# Altium PCB PCB1.PcbDoc
Units mil, origin at the board's own origin, x right, y up, seen from the top; angles counter-clockwise.
Board outline 2525 x 1870 mil, 2 copper layers (Top Layer, Bottom Layer); 35 components, 16 nets, 87 pads, 34 vias.
Unrouted connection lines stored in the file: 1.
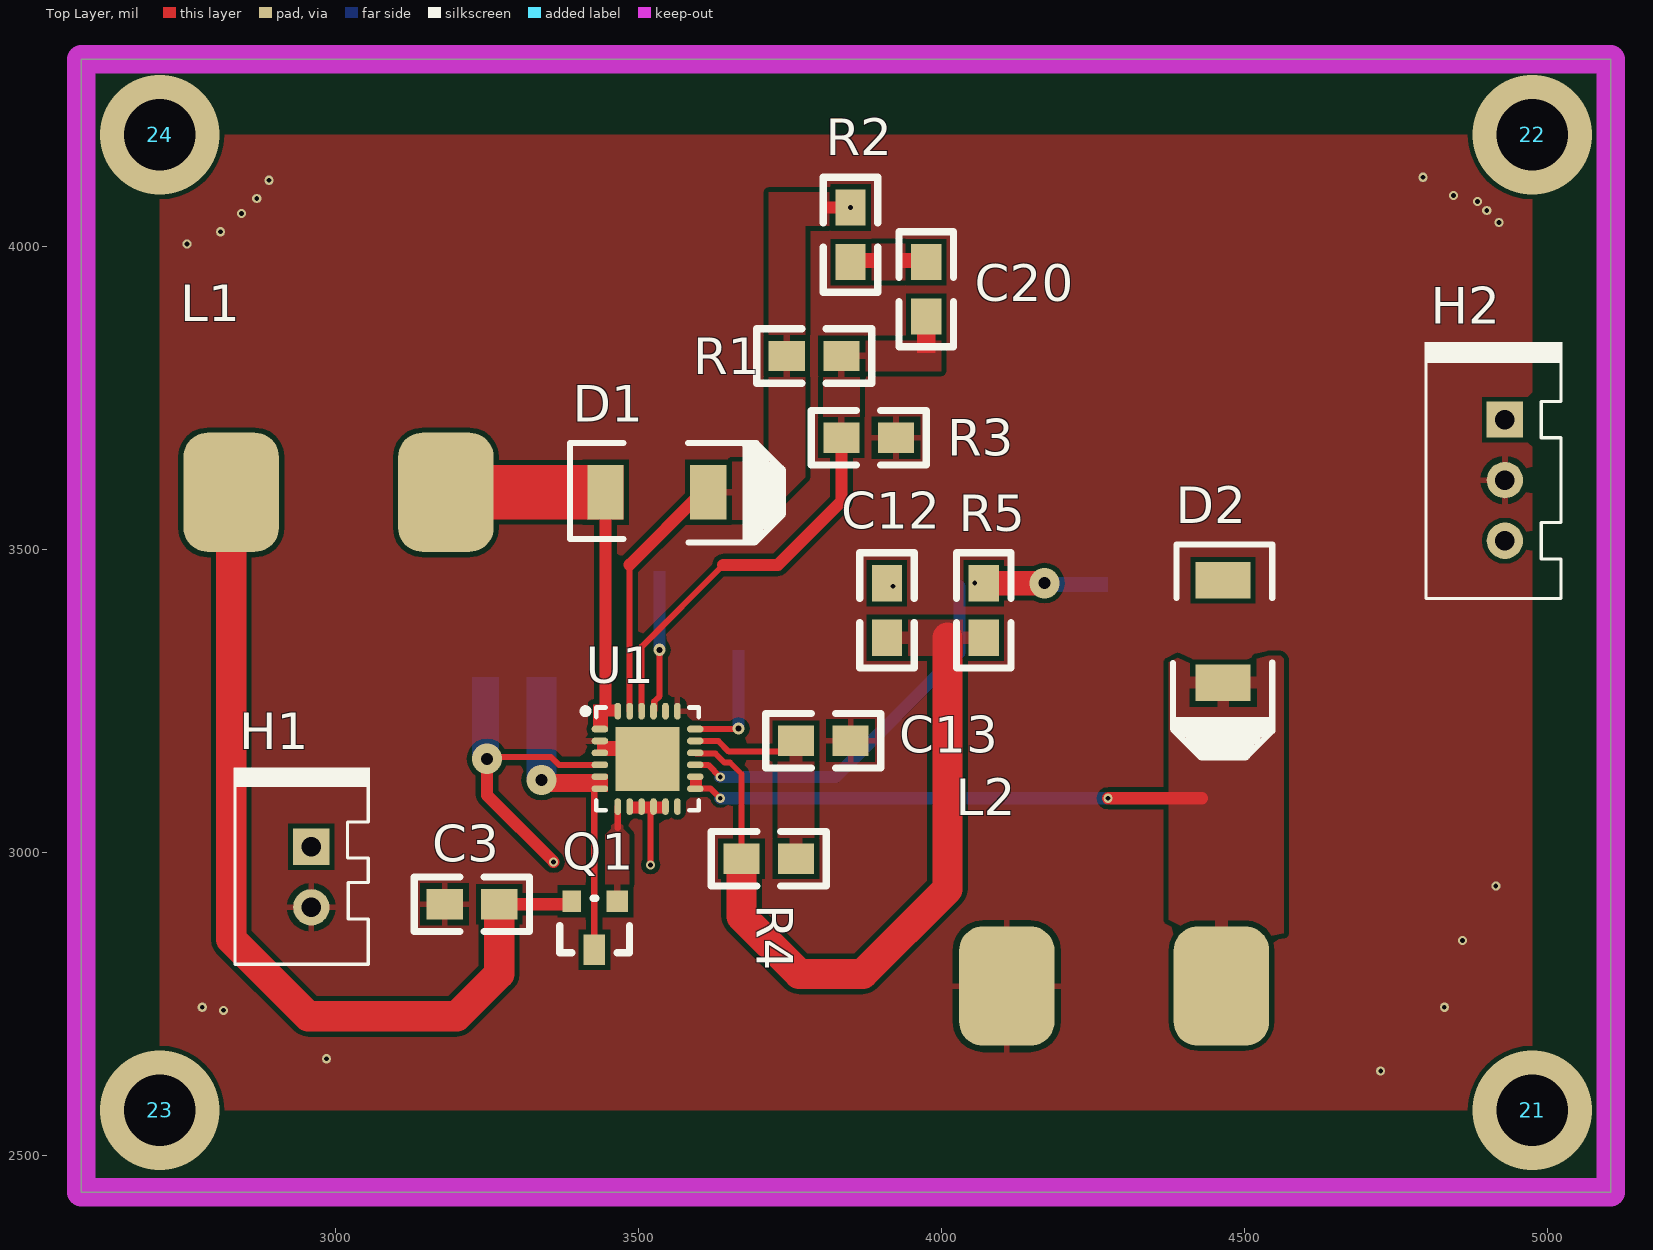
[diagram p0: Top Layer view]
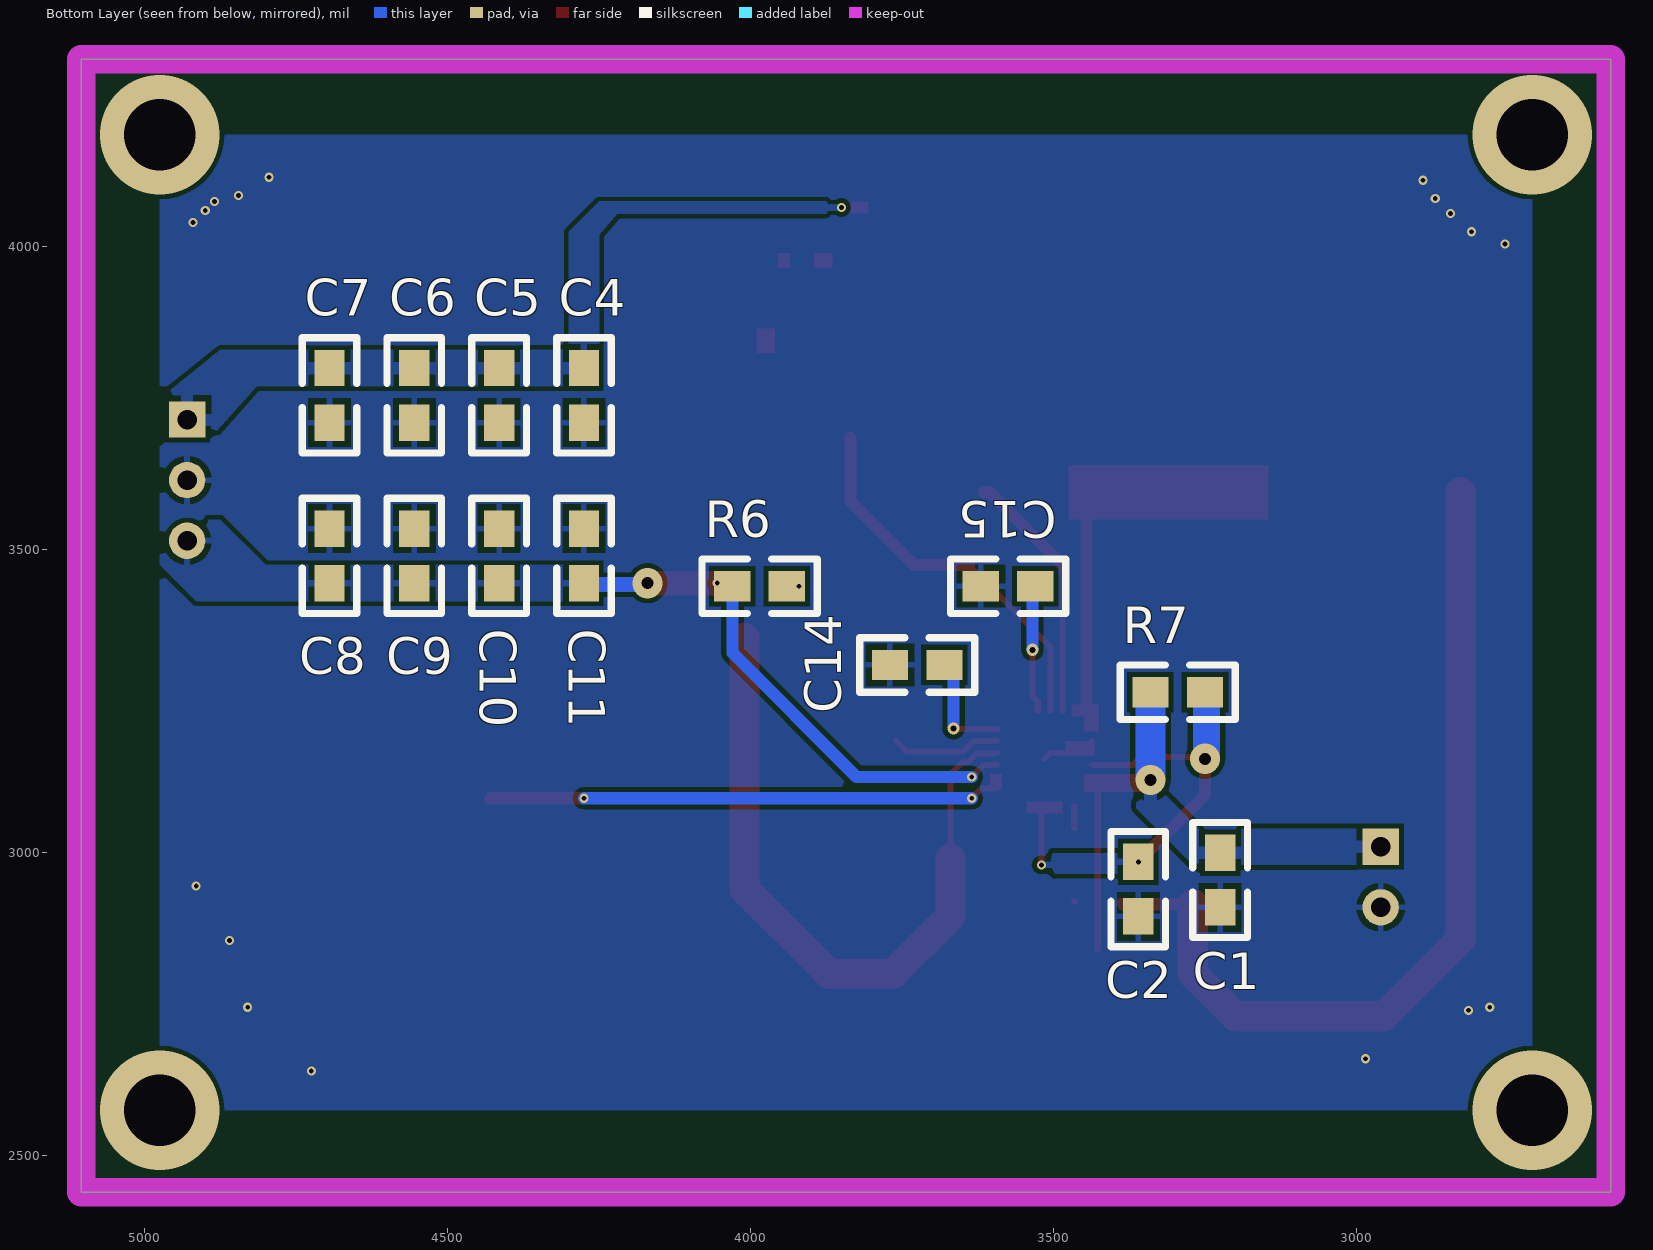
[diagram p1: Bottom Layer view, seen from below]

## Layer stack, top to bottom
Top Solder: solder mask 0.4, Solder Resist, Dk 3.5
Top Layer: signal copper 1.4
Dielectric 1: dielectric 12.6, FR-4, Dk 4.8
Bottom Layer: signal copper 1.4
Bottom Solder: solder mask 0.4, Solder Resist, Dk 3.5

## Board outline
2580,2440 5105,2440 5105,4310 2580,4310

## Design rules (kind name [scope] priority, off if disabled: settings)
Clearance [All] p1: gap=8
HoleSize [All] p1: absolutevalues=TRUE maxlimit=100 minlimit=12 maxpercent=80.000 minpercent=20.000
PolygonConnect [All] p1: connectstyle=Relief reliefconductorwidth=10 reliefentries=4 polygonreliefangle="90 Angle" airgapwidth=10
RoutingVias [All] p1: holewidth=28 width=50 viastyle="Through Hole" minholewidth=28 minwidth=50 maxholewidth=28 maxwidth=50
SolderMaskExpansion [All] p1: expansion=4
Width [All] p1: maxlimit=100 minlimit=6 preferedwidth=8
29 further rules are at their usual default settings.

## Components (designator, comment, footprint, x,y, rotation, side; value= is the part's Value field where it differs from the comment)
21 "螺丝孔" 固定过孔 4975,2575 r0 top
22 "螺丝孔" 固定过孔 4975,4185 r0 top
23 "螺丝孔" 固定过孔 2710,2575 r0 top
24 "螺丝孔" 固定过孔 2710,4185 r0 top
C1 "Cap1" 0805 3225,2910 r90 bottom
C2 "Cap1" 0805 3360,2895 r90 bottom
C3 "Cap1" 0805 3180,2915 r0 top
C4 "Cap1" 0805 4275,3710 r90 bottom
C5 "Cap1" 0805 4415,3710 r90 bottom
C6 "Cap1" 0805 4555,3710 r90 bottom
C7 "Cap1" 0805 4695,3710 r90 bottom
C8 "Cap1" 0805 4695,3535 r270 bottom
C9 "Cap1" 0805 4555,3535 r270 bottom
C10 "Cap1" 0805 4415,3535 r270 bottom
C11 "Cap1" 0805 4275,3535 r270 bottom
C12 "Cap1" 0805 3910,3445 r270 top
C13 "Cap1" 0805 3760,3185 r0 top
C14 "Cap1" 0805 3680,3310 r0 bottom
C15 "Cap1" 0805 3530,3440 r0 bottom
C20 "Cap1" 0805 3975,3885 r90 top
D1 "MBRM120" SMB 3445.71,3595 r0 top
D2 "MBRM120" SMB 4465,3450 r270 top
H1 "TJC3-2A" TJC3-2A 2960,3010 r270 top
H2 "TJC3-3A" TJC3-3A 4930,3614.83 r90 top
L1 "SMD" "功率电感-12x12 - duplicate" 3005,3595 r0 top
L2 "SMD" "功率电感-12x12 - duplicate" 4285,2780 r0 top
Q1 "AO3401" SOT-23 3512.76,2799.72 r180 top
R1 "RES" 0805 3835,3820 r180 top
R2 "RES" 0805 3850,3975 r90 top
R3 "RES" 0805 3835,3685 r0 top
R4 "RES" 0805 3670,2990 r0 top
R5 "RES" 0805 4070,3445 r270 top
R6 "RES" 0805 4030,3440 r180 bottom
R7 "RES" 0805 3340,3265 r180 bottom
U1 "TPS65131" LC-QFN-24_4x4x05P 3515,3155 r270 top

## Footprints (in the part's own frame and the unit in brackets; to place one, negate y for a bottom-side part, rotate by r counter-clockwise, add the part's x,y. Pads: shape width x height; smd on the part's side, far side on the other; paste and mask are expansions set on the pad)
0805 [mil]
  rect 60x50 smd: 1(0,0) 2(90,0)
  silkscreen extent -50,-45 140,45
LC-QFN-24_4x4x05P [mm]
  rect 2.68x2.68 smd mask+0.051: 0(0,0)
  oval 0.28x0.7 smd mask+0.051: 1(-1.25,-2) 2(-0.75,-2) 3(-0.25,-2) 4(0.25,-2) 5(0.75,-2) 6(1.25,-2) 13(1.25,2) 14(0.75,2) 15(0.25,2) 16(-0.25,2) 17(-0.75,2) 18(-1.25,2)
  oval 0.7x0.28 smd mask+0.051: 7(2,-1.25) 8(2,-0.75) 9(2,-0.25) 10(2,0.25) 11(2,0.75) 12(2,1.25) 19(-2,1.25) 20(-2,0.75) 21(-2,0.25) 22(-2,-0.25) 23(-2,-0.75) 24(-2,-1.25)
  silkscreen extent -2.15,-2.72 2.15,2.15
SMB [mm]
  rect 1.52x2.3 smd: A(0,0) K(4.3,0)
  silkscreen extent -1.5,-2.11 7.44,2.06
SOT-23 [mil]
  rect 36x36 smd: 1(47.76,-120.28)
  rect 30x36 smd: 2(122.76,-120.28)
  rect 36x50 smd: 3(85.76,-40.28)
  silkscreen extent 28,-125 143,-35
TJC3-2A [mil]
  rect 60x60 hole 32: 1(0,0)
  round 60 hole 32: 2(100,0)
  silkscreen extent -131,-128 194,97
TJC3-3A [mil]
  rect 60x60 hole 32: 1(100.17,0)
  round 60 hole 32: 2(0.17,0) 3(-99.83,0)
  silkscreen extent -196,-95 228,132
"功率电感-12x12 - duplicate" [mm]
  rrect50% 4x5 smd: 1(-4.5,0) 2(4.5,0)
  body extent -6.08,-6.15 6.21,6.15, height 8
固定过孔 [mil]

## Part data
L1 L2: library part 功率电感

## Via types
v1: diameter 15, hole 8, Top Layer to Bottom Layer, 25 vias
v2: diameter 196.85, hole 118.11, Top Layer to Bottom Layer, 4 vias
v3: diameter 50, hole 20, Top Layer to Bottom Layer, 3 vias
v4: diameter 20, hole 10, Top Layer to Bottom Layer, 2 vias

## Nets (pads, with @x,y where several pads share a name; then routed paths per layer and width w, separated by ;. In a path a pad name is that pad's centre, name@x,y a point inside that pad or via, vN(x,y) a via of type N, cw(c..) or ccw(c..) an arc to the next point about the centre after c; other vN are vias at no path point)
AGND: C1.1 C2.1 C3.1 C4.1 C5.1 C6.1 C7.1 C8.1 C9.1 C10.1 C11.1 C13.2 C14.2 C15.2 H1.2 H2.2 L2.1 R3.2 U1.0 U1.2 U1.3 U1.19 | length 102.5
  Top Layer w10: U1.2 U1.3 3505.16,3164.84 U1.0
  other v1: 4725,2640 2985,2660 2815,2740 2780,2745 4830,2745 4860,2855 4915,2945 2755,4005 2810,4025 4920,4040 2845,4055 4900,4060 4885,4075 2870,4080 4845,4085 2890,4110 4795,4115
NetC1_2: C1.2 H1.1 Q1.3 R7.1 U1.5 U1.6 | length 267
  Top Layer w10: Q1.3 U1.6@3427,3107
  other v3: 3340,3120
NetC2_2: C2.2 R7.2 U1.4 U1.8 U1.9 U1.10 U1.11 | length 408.4
  Top Layer w10: v3(3250,3155) 3253,3158 3355.74,3158 3368.58,3145.16 U1.4
  Top Layer w20: v3(3250,3155) 3250,3095 v1(3360,2985)
  other v1: 3520,2980
NetC3_2: C3.2 L1.1 Q1.2 | length 1498.7
  Top Layer w10: Q1.2@3385,2915 Q1.2
  Top Layer w20: C3.2 Q1.2@3385,2915
  Top Layer w50: L1.1 2827.83,2857.17 2955,2730 3200,2730 3270,2800 C3.2
NetC4_2: C4.2 C5.2 C6.2 C7.2 D1.K H2.1 R1.2 R2.2 U1.23 | length 420.8
  Top Layer w10: U1.23 3485.47,3475.47
  Top Layer w20: 3485.47,3475.47 3605,3595 D1.K
  other v1: 3850,4065
NetC8_2: C8.2 C9.2 C10.2 C11.2 D2.A H2.3 R5.1 R6.1 U1.15 | length 639.5
  Top Layer w10: U1.15 3614.84,3145.16 v1(3635,3125)
  Bottom Layer w20: v1(3635,3125) 3825,3125 4030,3330 R6.1
  other v1: 4055,3445
  other v3: 4170,3445
NetC12_1: C12.1 R6.2
  other v1: 3920,3440
NetC12_2: C12.2 R4.1 R5.2 U1.16 | length 1178
  Top Layer w10: U1.16 3594.91,3163.67 3627.13,3163.67 3641.8,3149 3651,3149 3670,3130 R4.1
  Top Layer w50: R4.1 3670,2895 3765,2800 3870,2800 4010,2940 4010,3355
NetC13_1: C13.1 R4.2 U1.17 | length 181
  Top Layer w10: U1.17 3631.73,3184.53 3649.26,3167 3742,3167 C13.1
NetC14_1: C14.1 U1.18 | length 71.6
  Top Layer w10: U1.18 3664.21,3204.21 v4(3665,3205)
NetC15_1: C15.1 U1.21 | length 105.5
  Top Layer w10: U1.21 3526.02,3234.91 3526.02,3249.68 3535,3258.66 v4(3535,3335)
NetC20_1: C20.1 R1.1 R3.1 U1.22 | length 640.6
  Top Layer w10: U1.22 3505.16,3340.16 3640,3475
  Top Layer w20: 3640,3475 3730,3475 3835,3580 R3.1
NetC20_2: C20.2 R2.1
NetD1_1: D1.A L1.2 U1.1 U1.24 | length 357.1
  Top Layer w20: 3445.71,3237.89 D1.A
NetD2_2: D2.K L2.2 U1.13 U1.14 | length 842.8
  Top Layer w10: U1.13 3619.21,3105.79 v1(3635,3090)
  Top Layer w20: v1(4275,3090) 4430,3090
  Bottom Layer w20: v1(3635,3090) v1(4275,3090)
NetQ1_1: Q1.1 U1.7 | length 36.6
  Top Layer w10: Q1.1 Q1.1@3465.79,2920.79 ; 3465.79,3040.79 U1.7
pads on no net: U1.12 U1.20
copper on no net:
  other v2: 2710,2575 4975,2575 2710,4185 4975,4185

## Polygon pours and split planes (outlines as drawn)
AGND on Top Layer "Top Layer-No Net" (solid, pour order 60): 2710,2575 4975,2575 4975,4185 2710,4185
NetC20_1 on Top Layer "Top Layer-No Net" (solid, pour order 50): 3805,3845 3805,3660 3865,3660 3865,3845
NetC20_1 on Top Layer "Top Layer-No Net" (solid, pour order 48): 3805,3795 4000,3795 4000,3915 3950,3915 3950,3845 3805,3845
NetC20_2 on Top Layer "Top Layer-No Net" (solid, pour order 46): 3825,4005 3825,3945 4000,3945 4000,4005
NetC4_2 on Top Layer "Top Layer-No Net" (solid, pour order 44): 3715,3795 3715,4090 3875,4090 3875,4035 3775,4035 3775,3795
NetC4_2 on Top Layer "Top Layer-No Net" (solid, pour order 42): 3585,3550 3645,3550 3705,3550 3775,3620 3775,3625 3775,3845 3715,3845 3715,3650 3710,3645 3590,3645 3585,3645
NetD2_2 on Top Layer "Top Layer-No Net" (solid, pour order 0): 4400,2685 4565,2685 4565,3320 4560,3325 4375,3325 4375,2685
NetC13_1 on Top Layer "Top Layer-No Net" (solid, pour order 8): 3730,2965 3790,2965 3790,3210 3730,3210
NetC12_2 on Top Layer "Top Layer-No Net" (solid, pour order 28): 3885,3385 3885,3325 4095,3325 4095,3385
NetQ1_1 on Top Layer "Top Layer-No Net" (solid, pour order 32): 3445,2900 3485,2900 3485,3030 3475,3040 3475,3055 3475,3095 3455,3095 3455,3040 3445,3030 3445,2900
AGND on Bottom Layer "Top Layer-No Net" (solid, pour order 62): 2710,2575 4975,2575 4975,4185 2710,4185
NetC4_2 on Bottom Layer "Top Layer-No Net" (solid, pour order 52): 3840,4055 4170,4055 4175,4055 4220,4055 4250,4020 4250,3980 4250,3770 4300,3770 4300,4025 4250,4075 3850,4075
NetC1_2 on Bottom Layer "Top Layer-No Net" (solid, pour order 20): 3255,2955 3255,3015 3230,3040 2930,3040 2930,2980 2995,2980 3205,2980 3205,2955
NetC1_2 on Bottom Layer "Top Layer-No Net" (solid, pour order 22): 3200,3030 3250,3030 3315,3095 3315,3120 3365,3120 3365,3090 3365,3075 3260,2970 3200,2970
NetC4_2 on Bottom Layer "Top Layer-No Net" (solid, pour order 24): 4250,3770 4720,3770 4795,3770 4815,3770 4900,3675 4975,3675 4975,3750 4875,3830 4715,3830 4250,3830
NetC8_2 on Bottom Layer "Top Layer-No Net" (solid, pour order 26): 4250,3415 4720,3415 4915,3415 4975,3475 4975,3550 4875,3550 4800,3475 4710,3475 4250,3475
NetC2_2 on Bottom Layer "Top Layer-No Net" (solid, pour order 40): 3340,2965 3534.53,2965 3545,2965 3545,3005 3542.5,2992.5 3512.5,2997.5 3499.93,2999.59 3335,2999.59

## Keep-outs
Keep-Out Layer:
  the board outline again, w47.24

## Other copper
Top Layer:
  rectangle net AGND: 3436.26,3164.84 3480,3184.53
  rectangle net NetC20_1: 3960,3825 3990,3865
  rectangle net NetC20_1: 3970,3835 3980,3865
  rectangle net NetC20_2: 3935,3965 3955,3990
  rectangle net NetC20_2: 3865,3965 3895,3990
  rectangle net NetC4_2: 3805,4055 3835,4075
  rectangle net NetC1_2: 3340,3100 3450,3130
  rectangle net NetC8_2: 4055,3425 4170,3465
  rectangle net NetC2_2: 3485.47,3065 3544.53,3085
  rectangle net NetC2_2: 3515,2980 3525,3080
  rectangle net NetD1_1: 3145,3550 3475,3640
  rectangle net NetD2_2: 3585,3105 3605,3130
  rectangle net NetD1_1: 3425,3200 3450,3245
  rectangle net NetD1_1: 3450,3225 3470,3245
Bottom Layer:
  rectangle net NetC14_1: 3655,3205 3675,3335
  rectangle net NetC1_2: 3315,3120 3365,3290
  rectangle net NetC2_2: 3225,3155 3270,3290
  rectangle net NetC15_1: 3525,3335 3545,3465
  rectangle net NetC8_2: 4165,3430 4275,3455